# Altium PCB STM32-PCB.PcbDoc
Units mm, origin at the board's own origin, x right, y up, seen from the top; angles counter-clockwise.
Board outline 45 x 33 mm, 2 copper layers (Top Layer, Bottom Layer), stack 1.671 mm thick; 30 components, 26 nets, 135 pads, 0 vias.
Unrouted connection lines stored in the file: 86.
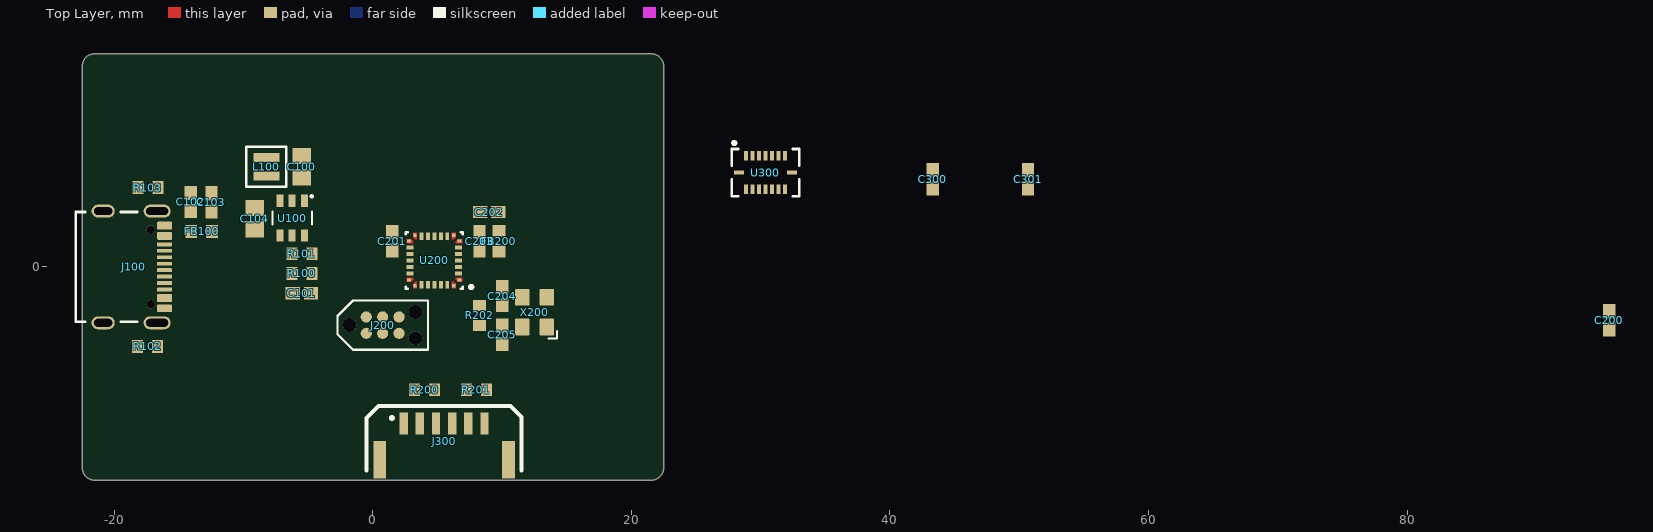
[diagram p0: Top Layer view]
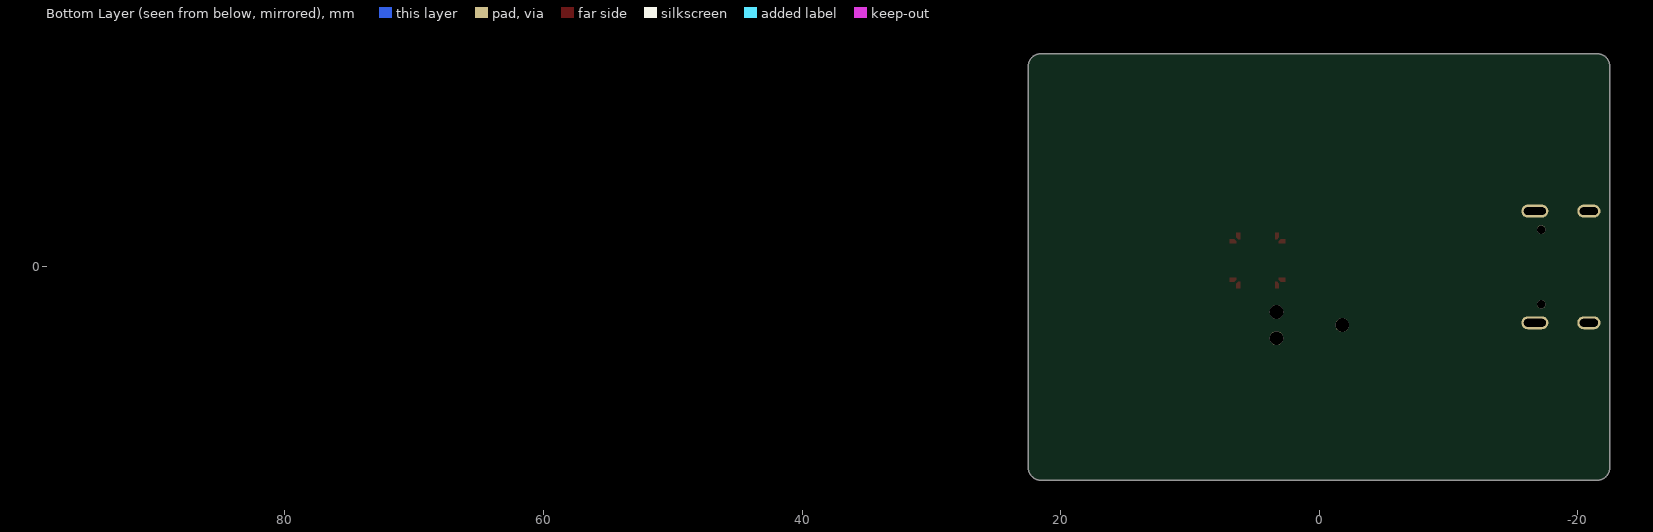
[diagram p1: Bottom Layer view, seen from below]

## Layer stack, top to bottom
Top Solder: solder mask 0.0102, Solder Resist, Dk 3.5
Top Layer: signal copper 0.0356
Dielectric 1: dielectric 1.6, FR-4, Dk 4.5
Bottom Layer: signal copper 0.0356
Bottom Solder: solder mask 0.0102, Solder Resist, Dk 3.5

## Board outline
-22.5,-15.5 ccw(c-21.5,-15.5) -21.5,-16.5 21.5,-16.5 ccw(c21.5,-15.5) 22.5,-15.5 22.5,15.5 ccw(c21.5,15.5) 21.5,16.5 -21.5,16.5 ccw(c-21.5,15.5) -22.5,15.5

## Design rules (kind name [scope] priority, off if disabled: settings)
BoardOutlineClearance [All] p1: gap=0.254 ignorepadtopadclearanceinfootprint=FALSE except(0: Arc-SplitContinuation Track-SplitContinuation SMDPad-SplitContinuation THPad-SplitContinuation Via-SplitContinuation Fill-SplitContinuation Poly-SplitContinuation Region-SplitContinuation Text-SplitContinuation)
Clearance [All] p1: gap=0.2 ignorepadtopadclearanceinfootprint=TRUE except(0.102: Arc-Text Track-Text SMDPad-Text THPad-Text Fill-Text Poly-Text Region-Text Text-Text; 0.114: Arc-Arc Arc-Track Arc-SMDPad Arc-Via Track-Track Track-SMDPad Track-Via; 0.127: Via-Text; 0.152: Arc-THPad Track-THPad SMDPad-SMDPad SMDPad-THPad SMDPad-Via THPad-THPad THPad-Via Via-Via; 0.25: Arc-Hole Track-Hole SMDPad-Hole THPad-Hole Via-Hole Fill-Hole Poly-Hole Region-Hole Text-Hole)
DiffPairsRouting [All] p1: maxlimit=0.254 minlimit=0.254 mostfreqgap=0.254 toplayer_minwidth=0.381 toplayer_maxwidth=0.381 toplayer_prefwidth=0.381 bottomlayer_minwidth=0.381 bottomlayer_maxwidth=0.381 bottomlayer_prefwidth=0.381 maxuncoupledlength=12.7
HoleSize [All] p1: absolutevalues=TRUE maxlimit=6.3 minlimit=0.2 maxpercent=80.000 minpercent=20.000
MinimumAnnularRing MinimumAnnularRing_PTH [IsPad AND (HoleSize > 0)] p1: minimumring=0.25
MinimumAnnularRing MinimumAnnularRing_Via [IsVia] p2: minimumring=0.125
MinimumSolderMaskSliver [All] p1: minsoldermaskwidth=0.1
PlaneConnect [All] p1: pad.planeconnectstyle=Relief pad.reliefexpansion=0.508 pad.reliefentries=4 pad.reliefconductorwidth=0.254 pad.reliefairgap=0.254 via.planeconnectstyle=Direct via.reliefexpansion=0.508 via.reliefentries=4 via.reliefconductorwidth=0.254 via.reliefairgap=0.254
PolygonConnect [All] p1: thpad.connectstyle=Relief thpad.reliefconductorwidth=0.254 thpad.reliefentries=4 thpad.polygonreliefangle="90 Angle" thpad.airgapwidth=0.254 smdpad.connectstyle=Relief smdpad.reliefconductorwidth=0.254 smdpad.reliefentries=4 smdpad.polygonreliefangle="90 Angle" smdpad.airgapwidth=0.254 via.connectstyle=Direct via.reliefconductorwidth=0.254 via.reliefentries=4 via.polygonreliefangle="90 Angle" via.airgapwidth=0.254
RoutingVias [All] p1: holewidth=0.3 width=0.45 viastyle="Through Hole" minholewidth=0.3 minwidth=0.45 maxholewidth=0.5 maxwidth=0.6
SilkToSilkClearance [All] p1: silktosilkclearance=0.15
SilkToSolderMaskClearance [IsPad] p1: minsilkscreentomaskgap=0.15 clearancetoexposedcopper=TRUE
SolderMaskExpansion [All] p1: expansion=0.05 istentingtop=FALSE
SupplyNets "Schematic Supply Nets_4" [InNet('+3V3')] p1: voltage=0.000
SupplyNets "Schematic Supply Nets_3" [InNet('+5V')] p2: voltage=0.000
SupplyNets "Schematic Supply Nets_2" [InNet('+VBUS')] p3: voltage=0.000
SupplyNets "Schematic Supply Nets_1" [InNet('+3V3A')] p4: voltage=0.000
SupplyNets "Schematic Supply Nets" [InNet('GND')] p5: voltage=0.000
UnRoutedNet [All] p1: checkbadconnections=TRUE
Width [All] p1: maxlimit=5 minlimit=0.1 preferedwidth=0.25
23 further rules are at their usual default settings.

## Classes and differential pairs
differential pair class USB: USB_D
differential pair USB_D: +USB_D_P -USB_D_N

## Components (designator, comment, footprint, x,y, rotation, side; value= is the part's Value field where it differs from the comment)
C100 "4u7" CAP_0805 -5.5,7.75 r270 top
C101 "22p" CAP_0603 -5.5,-2.024 r0 top
C102 "100n" CAP_0603 -14.104,5.026 r270 top
C103 "100n" CAP_0603 -12.5,5 r270 top
C104 "4u7" CAP_0805 -9.154,3.737 r90 top
C200 "100n" CAP_0603 95.642,-4.13 r90 top
C201 "100n" CAP_0603 1.5,2 r270 top
C202 "100n" CAP_0603 9,4.25 r0 top
C203 "100n" CAP_0603 8.25,2 r270 top
C204 "10p" CAP_0603 10,-2.25 r90 top
C205 "10p" CAP_0603 10,-5.25 r270 top
C300 "100n" CAP_0603 43.318,6.792 r90 top
C301 "100n" CAP_0603 50.684,6.792 r90 top
FB100 "120R" KMZ1608DHR121CTDH5 -13.25,2.75 r0 top
FB200 "120R" KMZ1608DHR121CTDH5 9.75,2 r270 top
J100 "USB4105-GF-A-060" USB4105-GF-A-060 -18.5,0 r270 top
J200 "TC2030-NL" TC2030-NL-FP 0.75,-4.5 r0 top
J300 "SM06B-GHS-TB" SM06B-GHS-TB 5.5,-13.5 r0 top
L100 "10u" FP-NRH2412-MFG -8.25,7.75 r90 top
R100 "887k" RES_0603 -5.5,-0.5 r0 top
R101 "280k" RES_0603 -5.5,1.024 r180 top
R102 "5k1" RES_0603 -17.428,-6.139 r180 top
R103 "5k1" RES_0603 -17.418,6.139 r180 top
R200 "5k1" RES_0603 4,-9.5 r180 top
R201 "5k1" RES_0603 8,-9.5 r0 top
R202 "5k1" RES_0603 8.25,-3.75 r90 top
U100 "LTC3405ES6#TRMPBF" SOT-23-6 -6.25,3.779 r270 top
U200 "STM32F042G6U6" STM-UFQFPN28_V 4.75,0.5 r180 top
U300 "BMI088" BMI088 30.364,7.3 r0 top
X200 "24MHz" TSX-3225_24.0000MF15X-AC 12.5,-3.5 r90 top

## Footprints (in the part's own frame and the unit in brackets; to place one, negate y for a bottom-side part, rotate by r counter-clockwise, add the part's x,y. Pads: shape width x height; smd on the part's side, far side on the other; paste and mask are expansions set on the pad)
BMI088 [mm]
  rect 0.3x0.75 smd mask+0.05: 1(-1.5,1.3) 2(-1,1.3) 3(-0.5,1.3) 4(0,1.3) 5(0.5,1.3) 6(1,1.3) 7(1.5,1.3) 9(1.5,-1.3) 10(1,-1.3) 11(0.5,-1.3) 12(0,-1.3) 13(-0.5,-1.3) 14(-1,-1.3) 15(-1.5,-1.3)
  rect 0.75x0.3 smd mask+0.05: 8(2.05,0) 16(-2.05,0)
  silkscreen extent -2.6,-1.83 2.6,2.4, body extent -2.25,-1.5 2.25,1.5, height 1.01
CAP_0603 [mm] "Chip Capacitor, 2-Leads, Body 1.60x0.80mm, IPC Medium Density"
  rect 1.1x0.95 smd mask+0.05: 1(-0.7,0) 2(0.7,0)
  body extent -0.85,-0.44 0.85,0.44, height 0.87
CAP_0805 [mm] "Chip Capacitor, 2-Leads, Body 2.00x1.25mm, IPC Medium Density"
  rect 1.25x1.45 smd mask+0.05: 1(-0.825,0) 2(0.825,0)
  body extent -1.05,-0.67 1.05,0.67, height 1.35
FP-NRH2412-MFG [mm]
  rect 0.7x2 smd paste+0 mask+0: 1(-0.725,0) 2(0.725,0)
  silkscreen extent -1.55,-1.55 1.55,1.55, body extent -1.35,-1.35 1.35,1.35, height 0.25
KMZ1608DHR121CTDH5 [mm]
  rect 0.9x1 smd mask+0.05: 1(-0.8,0) 2(0.8,0)
  body extent -0.8,-0.48 0.8,0.48, height 0.8
RES_0603 [mm] "Chip Resistor, 2-Leads, Body 1.60x0.80mm, IPC Medium Density"
  rect 0.85x1 smd mask+0.05: 1(-0.775,0) 2(0.775,0)
  body extent -0.85,-0.45 0.85,0.45, height 0.55
SM06B-GHS-TB [mm]
  rect 0.65x1.7 smd mask+0.05: 1(-3.125,1.4) 2(-1.875,1.4) 3(-0.625,1.4) 4(0.625,1.4) 5(1.875,1.4) 6(3.125,1.4)
  rect 1x2.9 smd mask+0.05: ""(-4.975,-1.4) ""(4.975,-1.4)
  silkscreen extent -6,-2.25 6,2.75, body extent -5.37,-2.8 5.38,2.05, height 4.26
SOT-23-6 [mm] "SOT23, 6-Leads, Body 2.90x2.80mm, Pitch 0.95mm, IPC Medium Density"
  rect 0.95x0.55 smd mask+0.05: 1(-1.35,0.95) 2(-1.35,0) 3(-1.35,-0.95) 4(1.35,-0.95) 5(1.35,0) 6(1.35,0.95)
  silkscreen extent -1.73,-1.53 0.5,1.56, body extent -1.4,-1.45 1.4,1.45, height 1
STM-UFQFPN28_V [mm] "QFN, 28-Leads, Body 4.1x4.1mm, Pitch 0.5mm"
  rect 0.3x0.25 smd: 1(-1.95,1.5) 7(-1.95,-1.5) 15(1.95,-1.5) 21(1.95,1.5)
  rect 0.55x0.3 smd: 2(-1.875,1) 3(-1.875,0.5) 4(-1.875,0) 5(-1.875,-0.5) 6(-1.875,-1) 16(1.875,-1) 17(1.875,-0.5) 18(1.875,0) 19(1.875,0.5) 20(1.875,1)
  rect 0.25x0.3 smd: 8(-1.5,-1.95) 14(1.5,-1.95) 22(1.5,1.95) 28(-1.5,1.95)
  rect 0.3x0.55 smd: 9(-1,-1.875) 10(-0.5,-1.875) 11(0,-1.875) 12(0.5,-1.875) 13(1,-1.875) 23(1,1.875) 24(0.5,1.875) 25(0,1.875) 26(-0.5,1.875) 27(-1,1.875)
  Top Layer region: 1.35,2.15 1.35,1.65 1.505,1.65 1.65,1.795 1.65,2.15
  Top Layer region: 2.15,-1.35 1.65,-1.35 1.65,-1.505 1.795,-1.65 2.15,-1.65
  Top Layer region: -2.15,1.35 -1.65,1.35 -1.65,1.505 -1.795,1.65 -2.15,1.65
  Top Layer region: 2.15,1.35 1.65,1.35 1.65,1.505 1.795,1.65 2.15,1.65
  Top Layer region: 1.35,-2.15 1.35,-1.65 1.505,-1.65 1.65,-1.795 1.65,-2.15
  Top Layer region: -1.35,2.15 -1.35,1.65 -1.505,1.65 -1.65,1.795 -1.65,2.15
  Top Layer region: -1.35,-2.15 -1.35,-1.65 -1.505,-1.65 -1.65,-1.795 -1.65,-2.15
  Top Layer region: -2.15,-1.35 -1.65,-1.35 -1.65,-1.505 -1.795,-1.65 -2.15,-1.65
  silkscreen extent -2.98,-2.2 2.2,2.2, body extent -2.05,-2.05 2.05,2.05, height 0.6
TC2030-NL-FP [mil]
  round 33.98 smd paste-16.99 mask+4: 1(-50,-25) 2(-50,25) 3(0,-25) 4(0,25) 5(50,-25) 6(50,25)
  round 42.01 hole 42.01 unplated: MH(-100,0) MH(100,-40) MH(100,40)
  silkscreen extent -138,-75 138,75
TSX-3225_24.0000MF15X-AC [mm]
  rrect10% 1.3x1.1 smd mask+0.05: 1(-1.15,-0.95) 2(1.15,-0.95) 3(1.15,0.95) 4(-1.15,0.95)
  silkscreen extent -2.03,-1.73 -1.45,-1.07, body extent -1.6,-1.28 1.6,1.22, height 0.61
USB4105-GF-A-060 [mm]
  rrect25% 0.6x1.15 smd mask+0.05: A1B12(-3.2,2.378) A4B9(-2.4,2.378) B1A12(3.2,2.378) B4A9(2.4,2.378)
  rrect25% 0.3x1.15 smd mask+0.05: A5(-1.25,2.378) A6(-0.25,2.378) A7(0.25,2.378) A8(1.25,2.378) B5(1.75,2.378) B6(0.75,2.378) B7(-0.75,2.378) B8(-1.75,2.378)
  round 0.65 hole 0.65 unplated mask+0.05: MH(-2.89,1.303) MH(2.89,1.303)
  oval 1x2.1 hole 0.6 slot 1.7 at 90 deg: SH(-4.32,1.803) SH(4.32,1.803)
  oval 1x1.8 hole 0.6 slot 1.4 at 90 deg: SH(-4.32,-2.377) SH(4.32,-2.377)
  silkscreen extent -4.25,-4.5 4.25,0.25, body extent -4.47,-4.97 4.47,2.73, height 3.27

## Part data
C100 C104: library part CAP_0805, "Capacitor SMD 0805 Generic"
C101 C102 C103 C200 C201 C202 C203 C204 C205 C300 C301: library part CAP_0603, "Capacitor SMD 0603 Generic"
FB100 FB200: library part KMZ1608DHR121CTDH5, "Ferrite Beads 120MHz 0.3Ohm 25% 1608 AEC-Q200"
J100: "USB Connector Type C SMT 12 Pin"
J200: "Tag-Connect No-Solder SWD Debug Connector (No Legs) DO NOT PLACE", Manufacturer=Tag-Connect, Manufacturer Part Number=TC2030-NL-FP
J300: "Header Connector 6 Position 1.25MM Pitch SMD Horizontal JST GH"
L100: library part CMP-14484-000582-1, "NRH2412T100MNGH - Shielded Wirewound Inductor 10uH 20% 0.51A 0.72Ω SMD", Case/Package=Nonstandard, Current Rating=450mA, DC Resistance (DCR)=600mR, Inductance=10uH, Max DC Current=810mA, Max Operating Temperature=120°C, Min Operating Temperature=-25°C, Package Quantity=2500, Self Resonant Frequency=29MHz, Test Frequency=100kHz, Tolerance=20%, Core Material=Ferrite, Halogen Free="Halogen Free", Height=1.2mm, Height - Seated (Max)=0.047inch, Length=0.095inch, Mount="Surface Mount", Packaging="Tape and Reel", RoHS Compliant=Yes, Saturation Current=810mA, Shielding=Shielded, Termination=SMD/SMT, Width=0.095inch
R100 R101 R102 R103 R200 R201 R202: library part RES_0603, "Resistor SMD 0603 Generic"
U100: "1.5MHz, 300mA Synchronous Step-Down Regulator in ThinSOT", Manufacturer="Analog Devices", Manufacturer Part Number=LTC3405ES6#TRMPBF
U200: library part CMP-0304-00112-2, "ARM Cortex-M0 32-bit MCU, 32 KB Flash, 6 KB Internal RAM, 24 I/Os, 28-Pin UFQFPN, -40 to 85 degC, Tray", I/Os (High Current)=24, Manufacturer=STMicroelectronics, Operating Frequency(F) (Processor speed) (MHz)=48, Package Description="28-Pin Ultra Thin Fine Pitch Quad Flat No-Lead, 4 x 4 x 0.6 mm Body, 0.5 mm Pitch", Package Reference=UFQFPN28, Supply Voltage(Vcc) min (V)=2, ComponentLink1Description="Manufacturer URL", ComponentLink1URL=http://www.st.com/, ComponentLink2Description=Datasheet, ComponentLink2URL=http://www.st.com/st-web-ui/static/active/en/resource/technical/document/datasheet/DM00105814.pdf, Core="ARM Cortex-M0", DatasheetVersion="Rev. 5", FLASH Size (Prog) (kB)=32, Internal RAM Size (kB)=6, Mounting Technology="Surface Mount", Packing=Tray, PartNumber=STM32F042G6U6
U300: "Inertial Measurement Unit IMU 6-Axis LGA", Manufacturer=Bosch, Manufacturer Part Number=BMI088
X200: library part TSX-3225_24.0000MF15X-AC, "Crystal SMD 24MHz 10PPM 7pF 3225", Manufacturer=Epson, Manufacturer Part Number=TSX-3225_24.0000MF15X-AC

## Nets (pads, with @x,y where several pads share a name; then routed paths per layer and width w, separated by ;. In a path a pad name is that pad's centre, name@x,y a point inside that pad or via, vN(x,y) a via of type N, cw(c..) or ccw(c..) an arc to the next point about the centre after c; other vN are vias at no path point)
+3V3: C100.1 C101.2 C201.2 C202.2 C300.2 C301.2 FB200.1 J200.1 J300.1 L100.2 R100.2 R200.2 R201.2 U200.17 U200.18 U300.3 U300.11
+3V3A: C203.2 FB200.2 U200.5
+5V: C103.2 C104.1 FB100.2 U100.1 U100.4
+VBUS: C102.2 FB100.1 J100.A4B9 J100.B4A9
BOOT0: R202.2 U200.1
BUCK_SW: L100.1 U100.3
BUCK_VFB: C101.1 R100.1 R101.2 U100.5
GND: C100.2 C102.1 C103.1 C104.2 C200.1 C201.1 C202.1 C203.1 C204.1 C205.1 C300.1 C301.1 J100.A1B12 J100.B1A12 J200.5 J300.2 J300.4 J300.6 R101.1 R102.1 R103.1 R202.1 U100.2 U100.6 U200.16 U300.2 U300.4 U300.6 U300.7 X200.2 X200.4
I2C_SCL: J300.3 R200.1 U200.27
I2C_SDA: J300.5 R201.1 U200.28
IMU_INT1: U200.14 U300.16
IMU_INT2: U200.15 U300.12
IMU_MISO: U200.12 U300.10 U300.15
IMU_MOSI: U200.13 U300.9
IMU_NCS_ACC: U200.8 U300.14
IMU_NCS_GYR: U200.9 U300.5
IMU_SCK: U200.11 U300.8
NRST: C200.2 J200.3 U200.4
OSC_IN: C204.2 U200.2 X200.1
OSC_OUT: C205.2 U200.3 X200.3
SWCLK: J200.4 U200.22
SWDIO: J200.2 U200.21
USB_CC1: J100.A5 R103.2
USB_CC2: J100.B5 R102.2
USB_D_N: J100.A7 J100.B7 U200.19
USB_D_P: J100.A6 J100.B6 U200.20
pads on no net: J100.A8 J100.B8 J100.MH J100.SH J200.6 J200.MH J300. U200.6 U200.7 U200.10 U200.23 U200.24 U200.25 U200.26 U300.1 U300.13

## Silkscreen, mask and mechanical layers (free items; w line width, h text height)
Board Shape:
  lines w0.2: -22.5,-15.5 ccw(c-21.5,-15.5) -21.5,-16.5 15.5,-16.5 21.5,-16.5 ccw(c21.5,-15.5) 22.5,-15.5 22.5,15.5 ccw(c21.5,15.5) 21.5,16.5 15.5,16.5 -21.5,16.5 ccw(c-21.5,15.5) -22.5,15.5 -22.5,-15.5